# Altium PCB BatteryBoard.PcbDoc
Units mil, origin at the board's own origin, x right, y up, seen from the top; angles counter-clockwise.
Board outline 3543.88 x 3543.5 mil, 4 copper layers (Top Layer, GND, VCC, Bottom Layer), stack 68.756 mil thick; 53 components, 28 nets, 207 pads, 127 vias.
Unrouted connection lines stored in the file: 98.
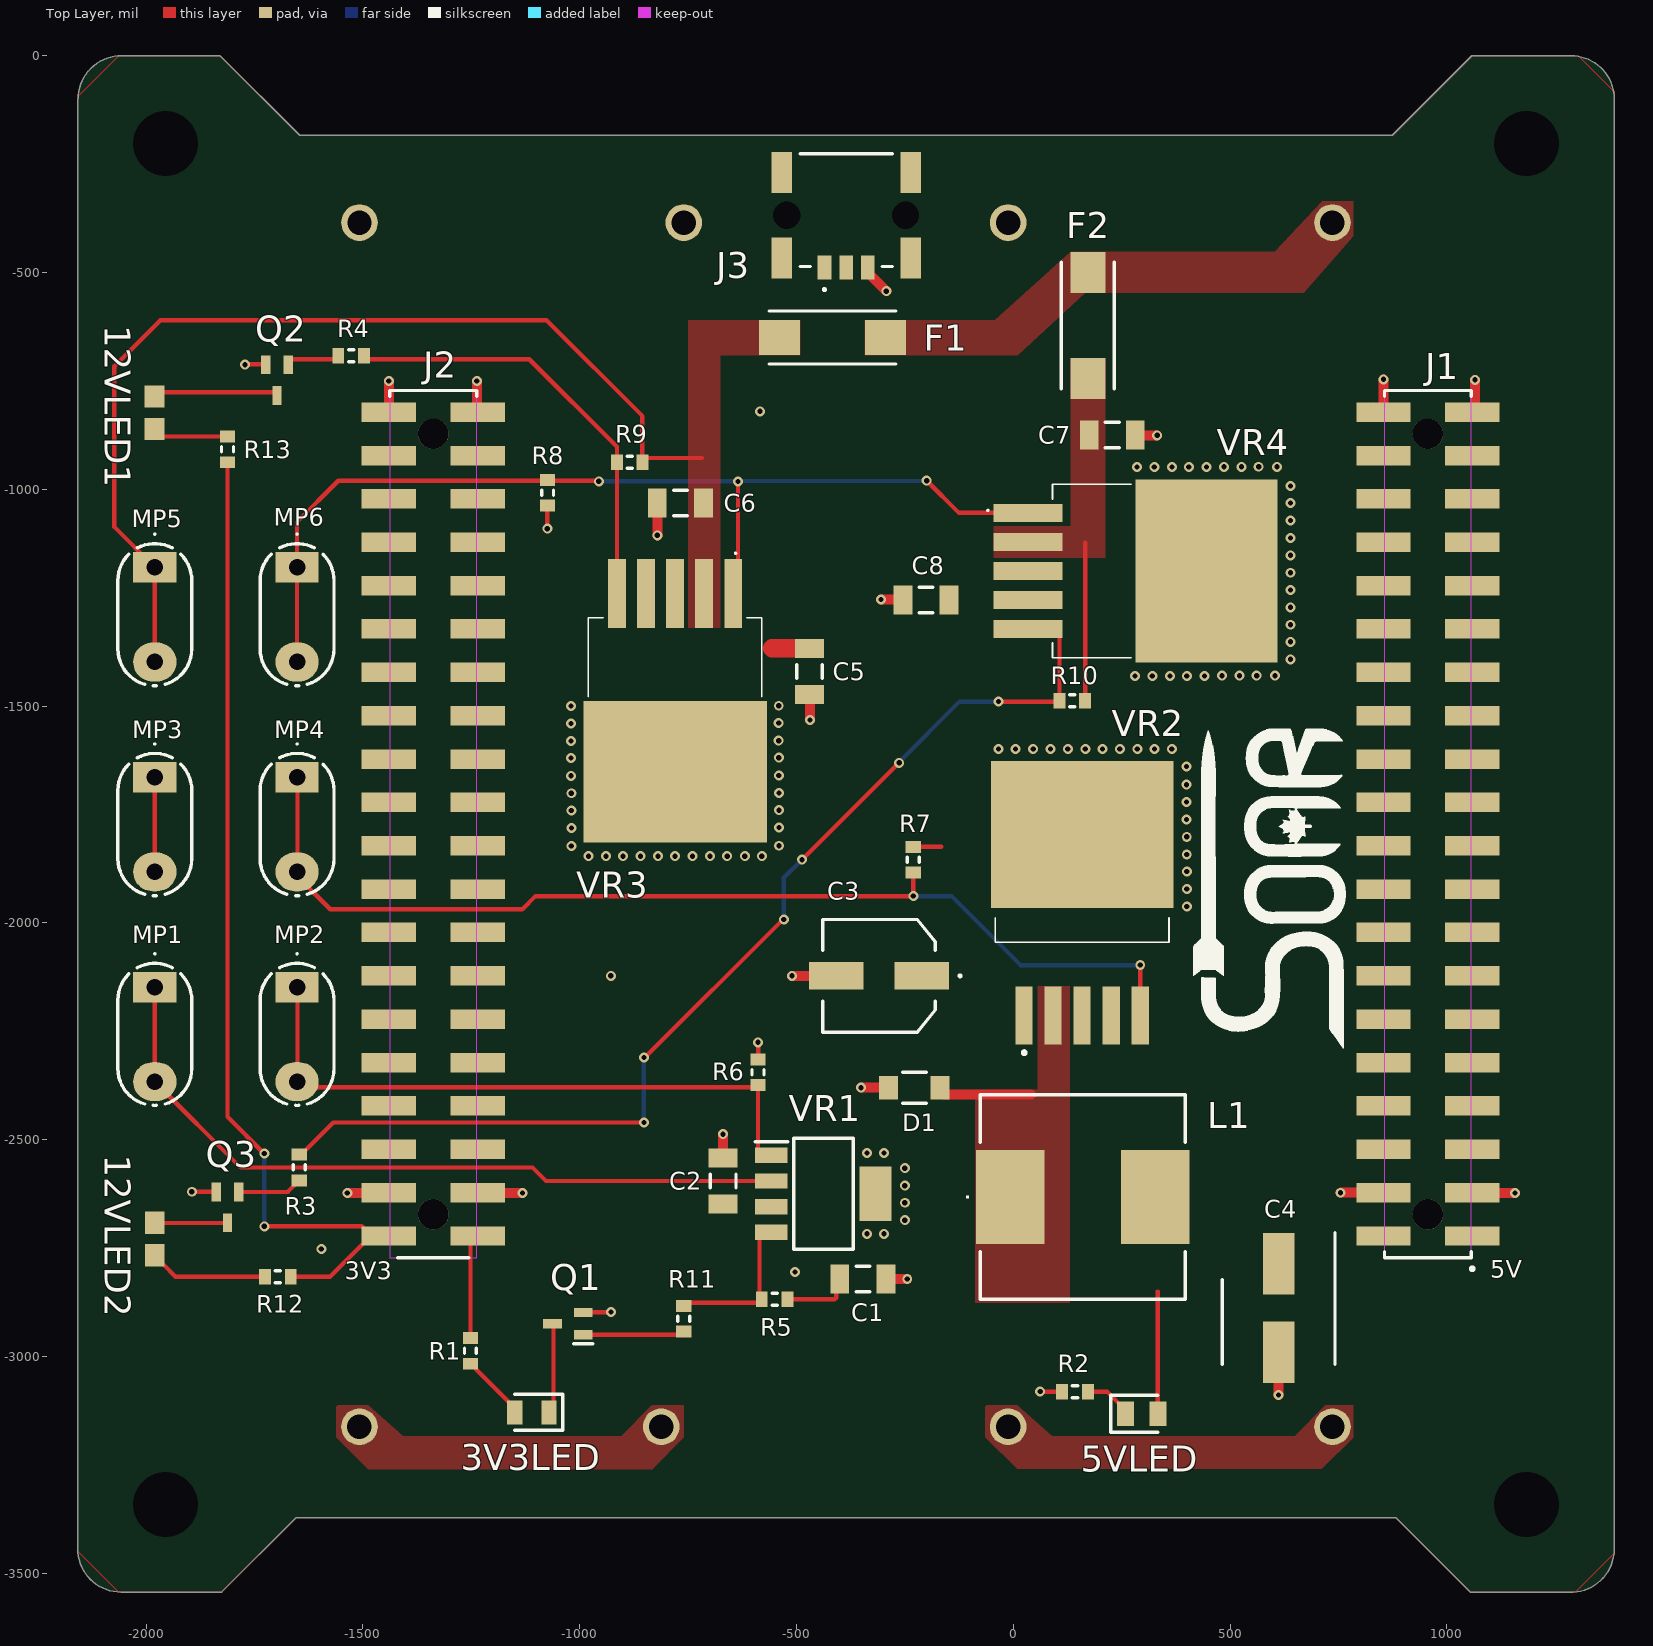
[diagram p0: Top Layer view]
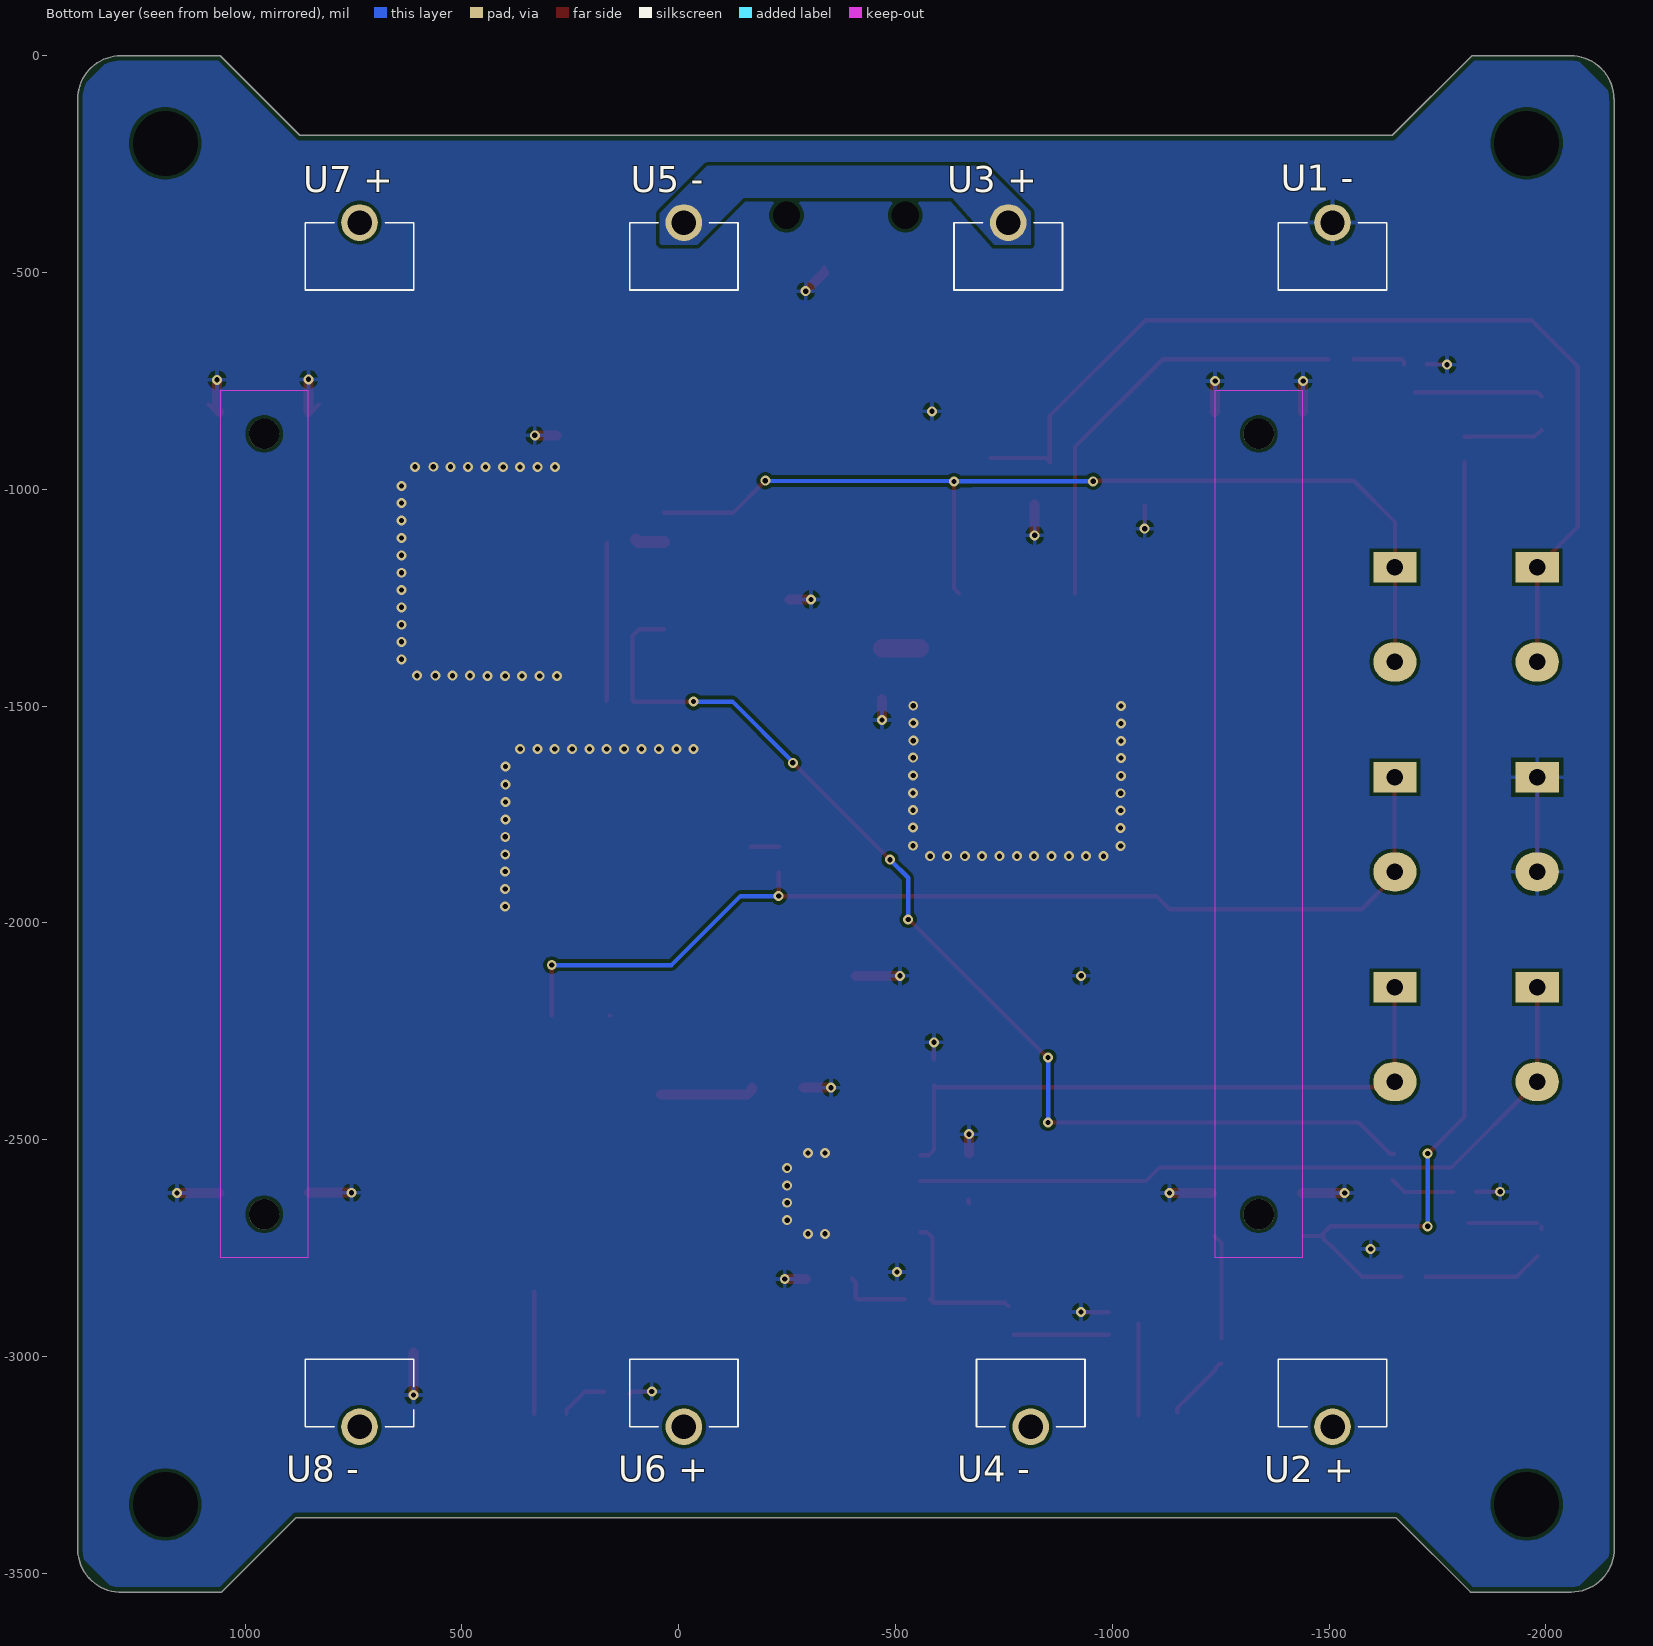
[diagram p1: Bottom Layer view, seen from below]
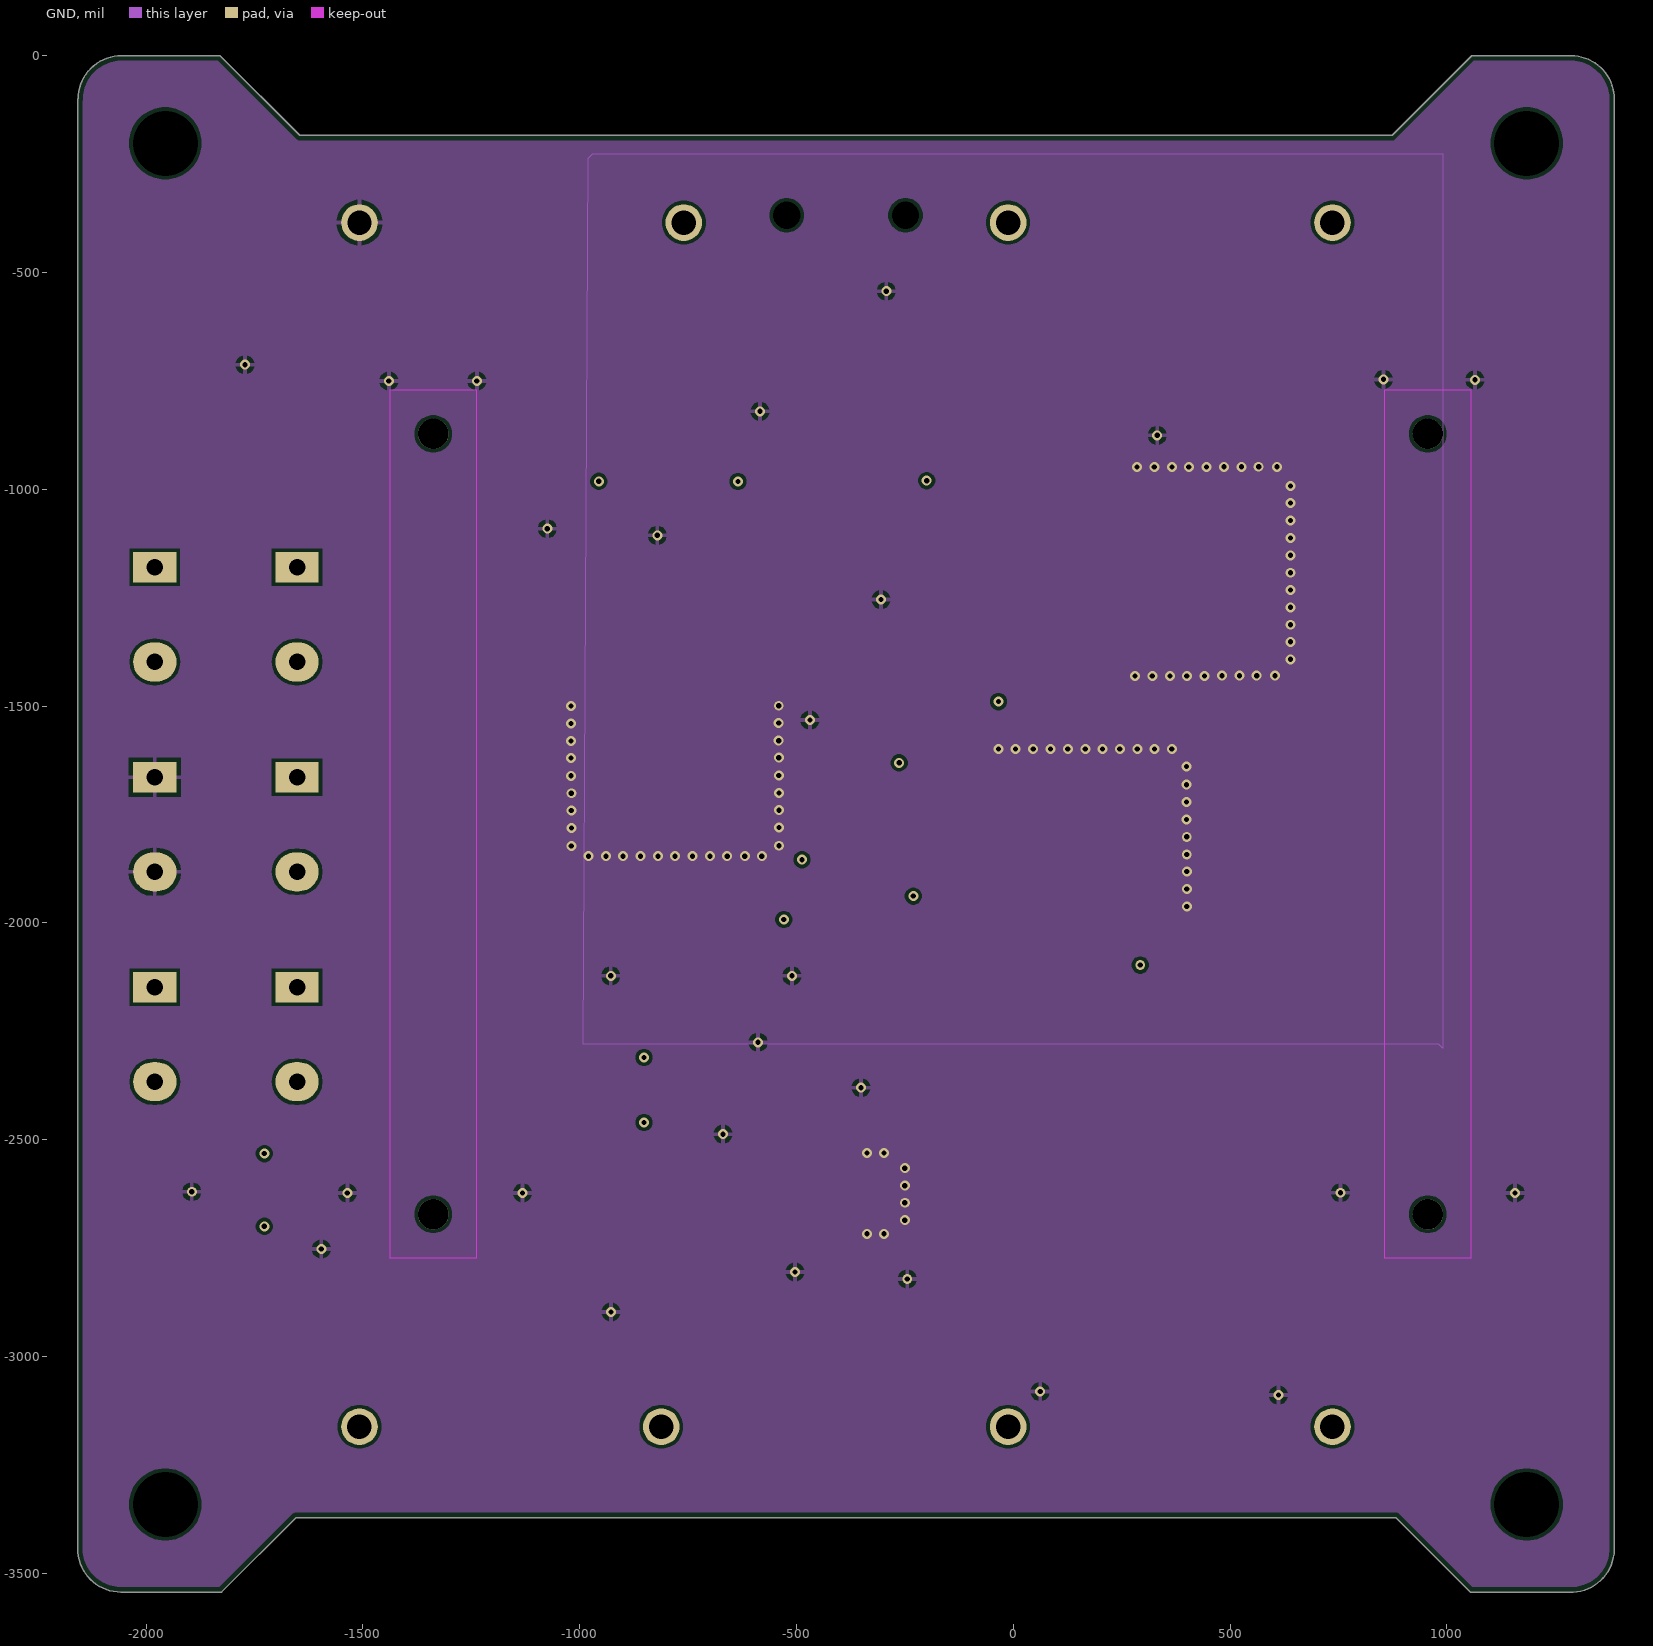
[diagram p2: GND]
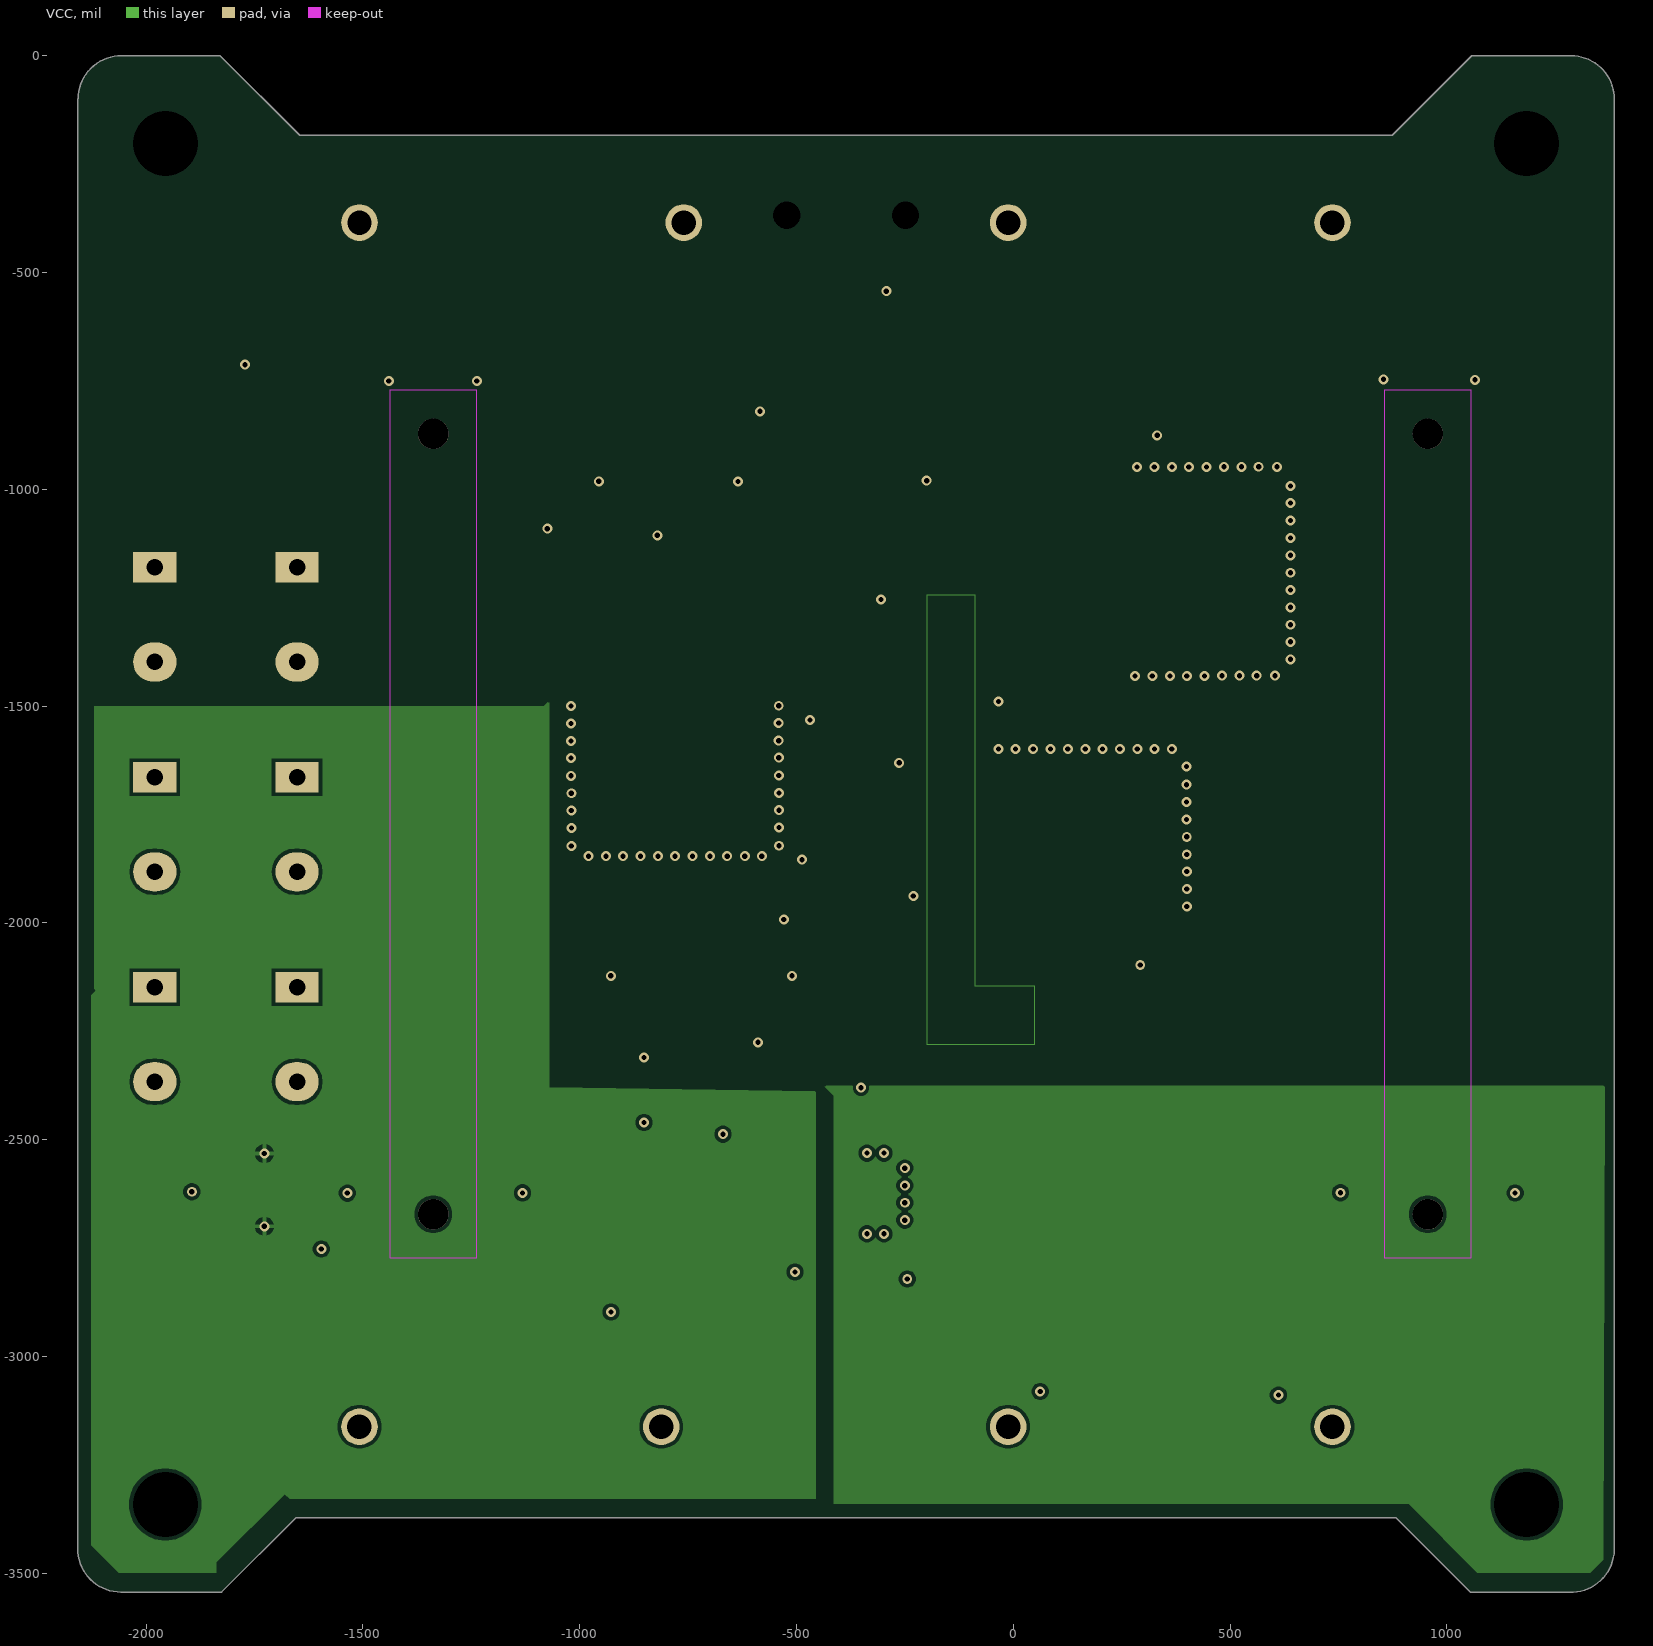
[diagram p3: VCC]

## Layer stack, top to bottom
Top Solder: solder mask 0.5, Solder Resist, Dk 3.3
Top Layer: signal copper 0.7
Dielectric 1: prepreg 2.8, PP-006, Dk 4.1
GND: signal copper 1.378
Dielectric1: core 59, FR-4, Dk 4.3
VCC: signal copper 1.378
Dielectric 2: prepreg 2.8, PP-006, Dk 4.1
Bottom Layer: signal copper 0.7
Bottom Solder: solder mask 0.5, Solder Resist, Dk 3.3

## Board outline
1386.02,-3438.34 cw(c1286.15,-3443.51) 1291.33,-3543.37 1054.01,-3543.37 882.01,-3371.37 -1653.99,-3371.37 -1825.99,-3543.37 -2058.37,-3543.37 -2058.37,-3543.32 cw(c-2057.85,-3443.33) -2157.85,-3442.8 -2157.85,-99.35 -2156.97,-99.35 cw(c-2056.97,-99.88) -2056.45,0.12 -2056.45,0 -1830.17,0 -1828.23,-1.13 -1645.99,-183.37 874.01,-183.37 1057.38,0 1286.18,0 1286.3,0.12 cw(c1286.03,-99.88) 1386.03,-100.14 1386.03,-2826.36

## Design rules (kind name [scope] priority, off if disabled: settings)
BoardOutlineClearance [All] p1: gap=11.81 ignorepadtopadclearanceinfootprint=FALSE except(15.75: Arc-SplitBarrior Arc-SplitContinuation Track-SplitBarrior Track-SplitContinuation SMDPad-SplitBarrior SMDPad-SplitContinuation THPad-SplitBarrior THPad-SplitContinuation Via-SplitBarrior Via-SplitContinuation Fill-SplitBarrior Fill-SplitContinuation Poly-SplitBarrior Poly-SplitContinuation Region-SplitBarrior Region-SplitContinuation Text-SplitBarrior Text-SplitContinuation)
Clearance "Clearance Different Nets" [All] p1: gap=7.87 ignorepadtopadclearanceinfootprint=FALSE except(3.5: Arc-Arc Arc-Track Arc-SMDPad Track-Track Track-SMDPad; 5: SMDPad-SMDPad SMDPad-Via THPad-Via Via-Via; 10: Arc-Via Arc-Text Track-Via Track-Text SMDPad-Text THPad-Text Via-Text Fill-Text Poly-Text Region-Text Text-Text; 19.68: THPad-THPad Via-Hole)
Clearance "Clearance Same Nets" [All] p2: gap=7.87 ignorepadtopadclearanceinfootprint=FALSE except(3.5: Arc-Arc Arc-Track Arc-SMDPad Track-Track Track-SMDPad SMDPad-SMDPad; 5: SMDPad-Via THPad-Via; 10: Arc-Via Arc-Text Track-Via Track-Text SMDPad-Text THPad-Text Via-Via Via-Text Fill-Text Poly-Text Region-Text Text-Text)
Clearance "Clearance Bottom Layer" [OnLayer('Bottom Layer')] p3: gap=8 ignorepadtopadclearanceinfootprint=TRUE except(10: Arc-Text Track-Text SMDPad-Text THPad-Text Via-Text Fill-Text Poly-Text Region-Text Text-Text)
Clearance "Clearance Top Layer" [OnLayer('Top Layer')] p4: gap=8 ignorepadtopadclearanceinfootprint=TRUE except(10: Arc-Text Track-Text SMDPad-Text THPad-Text Via-Text Fill-Text Poly-Text Region-Text Text-Text)
HoleSize [All] p1: absolutevalues=TRUE maxlimit=248.03 minlimit=7.87 maxpercent=80.000 minpercent=20.000
MinimumAnnularRing [All] p1: minimumring=5.12
MinimumSolderMaskSliver [All] p1: minsoldermaskwidth=3.94
PlaneClearance [All] p1: clearance=15
PolygonConnect PolygonConnect_1 [(InComponent('VR1') OR InComponent('VR2') OR InComponent('VR3') OR InComponent('VR4'))] p1: thpad.connectstyle=Relief thpad.reliefconductorwidth=10 thpad.reliefentries=4 thpad.polygonreliefangle="90 Angle" thpad.airgapwidth=10 smdpad.connectstyle=Direct smdpad.reliefconductorwidth=10 smdpad.reliefentries=4 smdpad.polygonreliefangle="90 Angle" smdpad.airgapwidth=10 via.connectstyle=Relief via.reliefconductorwidth=10 via.reliefentries=4 via.polygonreliefangle="90 Angle" via.airgapwidth=10
PolygonConnect "All Polygons" [(InNet('VBAT') OR InNet('3V3') OR InNet('5V') OR InNet('12V1') OR InNet('12V2') OR InNet('NetC6_1') OR InNet('NetC7_1') OR InNet('NetD1_1') OR InNet('NetD1_1') OR InNet('NetU3_1') OR InNet('NetU2_1') OR InNet('NetU6_1'))] p2: thpad.connectstyle=Direct thpad.reliefconductorwidth=10 thpad.reliefentries=4 thpad.polygonreliefangle="90 Angle" thpad.airgapwidth=10 smdpad.connectstyle=Direct smdpad.reliefconductorwidth=10 smdpad.reliefentries=4 smdpad.polygonreliefangle="90 Angle" smdpad.airgapwidth=10 via.connectstyle=Relief via.reliefconductorwidth=10 via.reliefentries=4 via.polygonreliefangle="90 Angle" via.airgapwidth=10 // Direct Connect
PolygonConnect [All] p3: connectstyle=Relief reliefconductorwidth=10 reliefentries=4 polygonreliefangle="90 Angle" airgapwidth=10
RoutingCorners [All] p1: cornerstyle=Round minsetback=100 maxsetback=100
RoutingVias [All] p1: holewidth=19.68 width=39.37 viastyle="Through Hole" minholewidth=7.87 minwidth=13.78 maxholewidth=39.37 maxwidth=78.74
SilkToSilkClearance [All] p1: silktosilkclearance=3.94
SilkToSolderMaskClearance [IsPad] p1: minsilkscreentomaskgap=3.94 clearancetoexposedcopper=TRUE
SolderMaskExpansion [All] p1: expansion=4 istentingtop=FALSE
Width [All] p1: maxlimit=100 minlimit=3.5 preferedwidth=15
24 further rules are at their usual default settings.

## Components (designator, comment, footprint, x,y, rotation, side; value= is the part's Value field where it differs from the comment)
3V3LED "APTD2012LZGCK" LEDC2012X105N -1110.17,-3128.72 r180 top
5VLED "APTD2012LQBC_D" LEDC2012X120N 296,-3132 r0 top
12VLED1 "APTD2012LSURCK" LEDM2012X120N -1980.73,-823.42 r270 top
12VLED2 "APTD2012LSURCK" LEDM2012X120N -1980,-2728.88 r270 top
C1 "Cap Semi" C1206 -347.07,-2821.01 r180 top value=10uF
C2 "Cap Semi" C1206 -669.21,-2595.18 r270 top value=10uF
C3 "100uF" EEEHP1H4R7P -309.91,-2121.97 r90 top
C4 "330uF" CAPAE660X800N 612,-2888 r270 top
C5 "Cap Semi" C1206 -469.98,-1420 r90 top value=10uF
C6 "Cap Semi" C1206 -768.03,-1031.19 r180 top value=0.1uF
C7 "Cap Semi" C1206 228.21,-874.94 r0 top value=0.1uF
C8 "Cap Semi" C1206 -201.44,-1255.37 r0 top value=10uF
D1 "SBR3U40S1F-7" SODFL3518X115N -228.45,-2380 r180 top
F1 "3404.0014.11" FUSM7431X260N -417.16,-649.77 r180 top
F2 "3404.0014.11" FUSM7431X260N 171.68,-622.06 r270 top
J1 "HW-20-16-F-D-250-SM-A" SAMTEC_HW-20-16-F-D-250-SM-A 1058.47,-2722 r90 top
J2 "HW-20-16-F-D-250-SM-A" SAMTEC_HW-20-16-F-D-250-SM-A -1235.37,-2722 r90 top
J3 "234450" 234450 -385.58,-368 r180 top
L1 "MSS1278H-334KED" MSS1278H334KED 160.06,-2632.03 r90 top
MP1 "7466310" 7466310 -1980,-2148 r270 top
MP2 "7466310" 7466310 -1652,-2148 r270 top
MP3 "7466310" 7466310 -1980,-1664 r270 top
MP4 "7466310" 7466310 -1652,-1664 r270 top
MP5 "7466310" 7466310 -1980,-1180 r270 top
MP6 "7466310" 7466310 -1652,-1180 r270 top
Q1 "2SC4213BTE85LF" SOT65P210X110-3N -1027.43,-2924.05 r180 top
Q2 "2SC4213BTE85LF" SOT65P210X110-3N -1698.32,-748 r270 top
Q3 "2SC4213BTE85LF" SOT65P210X110-3N -1812.4,-2656.04 r270 top
R1 "Res3" J1-0603 -1252,-2987.13 r90 top value=47
R2 "Res3" J1-0603 142.25,-3080.91 r180 top value=220
R3 "Res3" J1-0603 -1646.7,-2564 r270 top value=10k
R4 "Res3" J1-0603 -1527.39,-691.64 r180 top value=10k
R5 "Res3" J1-0603 -550.7,-2868.25 r0 top value=10K
R6 "Res3" J1-0603 -588.91,-2344.57 r270 top value=10K
R7 "Res3" J1-0603 -230.73,-1854.16 r270 top value=10K
R8 "Res3" J1-0603 -1074.22,-1008 r270 top value=10K
R9 "Res3" J1-0603 -885.03,-937.52 r0 top value=10K
R10 "Res3" J1-0603 136.03,-1487.84 r0 top value=10K
R11 "Res3" J1-0603 -759.85,-2913.01 r270 top value=10k
R12 "Res3" J1-0603 -1696,-2816 r0 top value=100
R13 "Res3" J1-0603 -1812.4,-908 r270 top value=100
"U1 -" "1017-1" 10171 -1508.06,-384.8 r0 bottom (schematic designator U1)
"U2 +" "1017-1" 10171 -1508.07,-3161.95 r180 bottom (schematic designator U2)
"U3 +" "1017-1" 10171 -760.03,-384.8 r0 bottom (schematic designator U3)
"U4 -" "1017-1" 10171 -812.04,-3161.95 r180 bottom (schematic designator U4)
"U5 -" "1017-1" 10171 -12,-384.8 r0 bottom (schematic designator U5)
"U6 +" "1017-1" 10171 -12,-3161.95 r180 bottom (schematic designator U6)
"U7 +" "1017-1" 10171 736.03,-384.8 r0 bottom (schematic designator U7)
"U8 -" "1017-1" 10171 736.03,-3161.95 r180 bottom (schematic designator U8)
VR1 "LP3852EMP-3.3_NOPB" SOT150P700X180-5N -437.99,-2624.71 r0 top
VR2 "TL2575-05IKTTR" TL1963AQKTTRQ1 158.87,-1997.97 r0 top
VR3 "MIC29301-12WU" MIC2930133WUTR -780.17,-1651.29 r180 top
VR4 "MIC29301-12WU" MIC2930133WUTR 445.36,-1188.36 r270 top

## Footprints (in the part's own frame and the unit in brackets; to place one, negate y for a bottom-side part, rotate by r counter-clockwise, add the part's x,y. Pads: shape width x height; smd on the part's side, far side on the other; paste and mask are expansions set on the pad)
10171 [mm]
  round 2.145 hole 1.43: 1(0,0)
  silkscreen extent -3.17,0 3.17,3.95, body extent -3.17,-0.61 3.17,3.95, height 13.94
234450 [mm]
  rect 0.8x1.4 smd: 1(1.27,3.05) 2(0,3.05) 3(-1.27,3.05)
  round 0.8 hole 1.6 unplated: MH1(-3.48,0) MH2(3.48,0)
  rect 1.2x2.4 smd: MP1(-3.78,2.5) MP2(-3.78,-2.5) MP3(3.78,-2.5) MP4(3.78,2.5)
  silkscreen extent -2.7,-3.6 2.7,4.4, body extent -4.45,-3.57 4.45,3.63, height 2.97
7466310 [mm]
  rect 1.778x2.54 hole 0.97: 1(0,0)
  oval 2.286x2.54 hole 0.97: 2(5.54,0)
  silkscreen extent -2,-2.16 6.94,2.16, body extent -1.38,-2.16 6.92,2.16, height 7.1
C1206 [mm] "Chip Capacitor, Body 3.2x1.6mm, IPC High Density"
  rect 1.1x1.7 smd: 1(-1.35,0) 2(1.35,0)
  silkscreen extent -0.4,-0.75 0.4,0.75, body extent -1.7,-0.9 1.7,0.9, height 1.3
CAPAE660X800N [mm]
  rect 3.6x1.85 smd: 1(-2.6,0) 2(2.6,0)
  silkscreen extent -4.4,-3.3 3.3,3.3, body extent -3.7,-3.4 3.7,3.4, height 8
EEEHP1H4R7P [mm]
  rect 1.6x3.2 smd: 1(0,-2.5) 2(0,2.5)
  silkscreen extent -3.3,-4.8 3.3,3.3, body extent -3.3,-3.65 3.3,3.65, height 7.7
FUSM7431X260N [mm]
  rect 2.4x2.05 smd: 1(-3.1,0) 2(3.1,0)
  silkscreen extent -3.7,-1.55 3.7,1.55
J1-0603 [mm] "Chip Resistor, Body 1.6x0.8mm, IPC High Density"
  rect 0.7x0.9 smd: 1(-0.75,0) 2(0.75,0)
  silkscreen extent -0.15,-0.35 0.15,0.35, body extent -0.85,-0.48 0.85,0.48, height 0.9
LEDC2012X105N [mm]
  rect 0.9x1.4 smd: 1(-1,0) 2(1,0)
  silkscreen extent -1.8,-1.05 1,1.05, body extent -1.03,-0.63 0.97,0.63, height 1.05
LEDC2012X120N [mm]
  rect 1x1.45 smd: 1(-0.95,0) 2(0.95,0)
  silkscreen extent -1.8,-1.07 0.95,1.07, body extent -1,-0.64 1,0.62, height 0.99
LEDM2012X120N [mm]
  rect 1.3x1.15 smd: 1(-0.95,0) 2(0.95,0)
  body extent -1,-0.63 1,0.63, height 1.05
MIC2930133WUTR [mil]
  rect 40.98x158.98 smd: 1(-134.02,-411.5) 2(-67.01,-411.5) 3(0,-411.5) 4(67.01,-411.5) 5(134.02,-411.5)
  rect 422.99x327.01 smd: 6(0,0)
  silkscreen extent -200,-506 200,-173, body extent -200,-355 200,0, height 204
MSS1278H334KED [mm]
  rect 5.5x4 smd: 1(0,4.25) 2(0,-4.25)
  silkscreen extent -6,-6 6,6.8, body extent -6,-6 6,6, height 8.15
SAMTEC_HW-20-16-F-D-250-SM-A [mm]
  rect 1.14x3.175 smd: 01(0,0) 02(0,5.205) 03(2.54,0) 04(2.54,5.205) 05(5.08,0) 06(5.08,5.205) 07(7.62,0) 08(7.62,5.205) 09(10.16,0) 10(10.16,5.205) 11(12.7,0) 12(12.7,5.205) 13(15.24,0) 14(15.24,5.205) 15(17.78,0) 16(17.78,5.205) 17(20.32,0) 18(20.32,5.205) 19(22.86,0) 20(22.86,5.205) 21(25.4,0) 22(25.4,5.205) 23(27.94,0) 24(27.94,5.205) 25(30.48,0) 26(30.48,5.205) 27(33.02,0) 28(33.02,5.205) 29(35.56,0) 30(35.56,5.205) 31(38.1,0) 32(38.1,5.205) 33(40.64,0) 34(40.64,5.205) 35(43.18,0) 36(43.18,5.205) 37(45.72,0) 38(45.72,5.205) 39(48.26,0) 40(48.26,5.205)
  round 1.78 hole 1.78 unplated mask+0.076: ""(1.27,2.603) ""(46.99,2.603)
  silkscreen extent -2.02,-0.1 49.53,5.14
SODFL3518X115N [mm]
  rect 1.12x1.37 smd: 1(-1.5,0) 2(1.5,0)
  silkscreen extent -0.69,-0.9 0.69,0.9, body extent -1.75,-0.9 1.75,0.9, height 1.15
SOT65P210X110-3N [mm]
  rect 1.1x0.55 smd: 1(-0.9,0.65) 2(-0.9,-0.65) 3(0.9,0)
  silkscreen extent -1.45,1.17 -0.35,1.17
SOT150P700X180-5N [mm]
  rect 1.9x0.9 smd: 1(-3.05,2.25) 2(-3.05,0.75) 3(-3.05,-0.75) 4(-3.05,-2.25)
  rect 1.9x3.2 smd: 5(3.05,0)
  silkscreen extent -4,-3.25 1.75,3.25, body extent -3.48,-3.25 3.48,3.25, height 1.68
TL1963AQKTTRQ1 [mm]
  rect 1x3.4 smd: 1(-3.4,-5.47) 2(-1.7,-5.47) 3(0,-5.47) 4(1.7,-5.47) 5(3.4,-5.47)
  rect 10.7x8.6 smd: 6(0,5.13)
  silkscreen extent -5.09,-7.75 5.09,0.25, body extent -5.08,-6.79 5.08,8.48, height 4.59

## Part data
3V3LED: "LED", Manufacturer_Name=Kingbright, Mouser Part Number=604-APTD2012LZGCK, Arrow Part Number=APTD2012LZGCK, Arrow Price/Stock=https://www.arrow.com/en/products/aptd2012lzgck/kingbright?region=nac, Datasheet Link=http://www.kingbrightusa.com/images/catalog/SPEC/APTD2012LZGCK.pdf, Height=1.05mm, Manufacturer_Part_Number=APTD2012LZGCK, Mouser Price/Stock=https://www.mouser.co.uk/ProductDetail/Kingbright/APTD2012LZGCK?qs=AQlKX63v8RvUnlqpSGhMeA%3D%3D
5VLED: "LED", Arrow Part Number=APTD2012LQBC/D, Manufacturer_Name=Kingbright, Mouser Part Number=604-APTD2012LQBCD, Arrow Price/Stock=https://www.arrow.com/en/products/aptd2012lqbcd/kingbright?region=nac, Datasheet Link=https://componentsearchengine.com/Datasheets/1/APTD2012LQBC_D.pdf, Height=1.2mm, Manufacturer_Part_Number=APTD2012LQBC/D, Mouser Price/Stock=https://www.mouser.co.uk/ProductDetail/Kingbright/APTD2012LQBC-D?qs=AQlKX63v8RvDGqprk6aUCg%3D%3D
12VLED1 12VLED2: "LED", Manufacturer_Name=Kingbright, Mouser Part Number=604-APTD2012LSURCK, Arrow Part Number=APTD2012LSURCK, Arrow Price/Stock=https://www.arrow.com/en/products/aptd2012lsurck/kingbright?region=nac, Datasheet Link=http://www.kingbrightusa.com/images/catalog/SPEC/APTD2012LSURCK.pdf, Height=1.2mm, Manufacturer_Part_Number=APTD2012LSURCK, Mouser Price/Stock=https://www.mouser.co.uk/ProductDetail/Kingbright/APTD2012LSURCK?qs=AQlKX63v8RvkMadNvwbkxw%3D%3D
C1 C2 C5 C6 C7 C8: "Capacitor (Semiconductor SIM Model)", LatestRevisionDate=29-May-2009, LatestRevisionNote="IPC-7351 Footprint Added.", PackageDescription="Chip Capacitor", PackageReference=C1206, Published=8-Jun-2000, Publisher="Altium Limited"
C3: library part EEE-FPE101XAL, "Capacitor Polarised", Manufacturer_Name=Panasonic, Mouser Part Number=667-EEE-FPE101XAL, Arrow Part Number=EEE-FPE101XAL, Arrow Price/Stock=https://www.arrow.com/en/products/eee-fpe101xal/panasonic?region=nac, Datasheet Link=http://industrial.panasonic.com/cdbs/www-data/pdf/RDE0000/RDE0000C1272.pdf, Manufacturer_Part_Number=EEE-FPE101XAL, Mouser Price/Stock=https://www.mouser.co.uk/ProductDetail/Panasonic/EEE-FPE101xAL?qs=vmHwEFxEFR%2FU1ayQL%252BhZlg%3D%3D
C4: library part EMZR160ARA331MF80G, "Capacitor Polarised", Manufacturer_Name=Chemi-Con, Mouser Part Number=661-EMZR160ARA331MF8, Arrow Part Number=EMZR160ARA331MF80G, Arrow Price/Stock=https://www.arrow.com/en/products/emzr160ara331mf80g/united-chemi-con, Datasheet Link=https://datasheet.datasheetarchive.com/originals/distributors/DKDS-39/4980.pdf, Height=8mm, Manufacturer_Part_Number=EMZR160ARA331MF80G, Mouser Price/Stock=https://www.mouser.co.uk/ProductDetail/United-Chemi-Con/EMZR160ARA331MF80G?qs=y6ZabgHbY%252BxNFfWWRjsyvw%3D%3D
D1: "Diode", Manufacturer_Name="Diodes Incorporated", Mouser Part Number=621-SBR3U40S1F-7, Arrow Part Number=SBR3U40S1F-7, Arrow Price/Stock=https://www.arrow.com/en/products/sbr3u40s1f-7/diodes-incorporated, Datasheet Link=https://www.arrow.com/en/products/sbr3u40s1f-7/diodes-incorporated, Height=1.15mm, Manufacturer_Part_Number=SBR3U40S1F-7, Mouser Price/Stock=https://www.mouser.co.uk/ProductDetail/Diodes-Incorporated/SBR3U40S1F-7?qs=HXFqYaX1Q2yP2B8FJNWOhg%3D%3D
F1 F2: "Fuse", Manufacturer_Name=SCHURTER, Mouser Part Number=693-3404.0014.11, Arrow Part Number=3404.0014.11, Arrow Price/Stock=https://www.arrow.com/en/products/3404.0014.11/schurter?region=europe, Datasheet Link=https://www.schurter.sg/en/datasheet/typ_OMF_125.pdf, Height=2.6mm, Manufacturer_Part_Number=3404.0014.11, Mouser Price/Stock=https://www.mouser.co.uk/ProductDetail/Schurter/3404001411?qs=8QfiMw8FY5MW%252BuaV2dEayA%3D%3D
J1 J2: Package=None, Availability=Unavailable, MP=HW-20-16-F-D-250-SM-A, Price=None
J3: "Connector", Manufacturer_Name=ERNI, Mouser Part Number=305-234450, Arrow Part Number=234450, Arrow Price/Stock=https://www.arrow.com/en/products/234450/erni-electronics?region=europe, Datasheet Link=https://www.erni.com/fileadmin/import/products/assets/DC0000169.PDF, Height=2.98mm, Manufacturer_Part_Number=234450, Mouser Price/Stock=https://www.mouser.co.uk/ProductDetail/ERNI/234450?qs=DK05bRAVOD4CDOGVl35lNg%3D%3D
L1: "Inductor", Manufacturer_Name=COILCRAFT, Mouser Part Number=994-MSS1278H-334KED, Datasheet Link=https://4donline.ihs.com/images/VipMasterIC/IC/COLC/COLC-S-A0010155479/COLC-S-A0010155479-1.pdf?hkey=EF798316E3902B6ED9A73243A3159BB0, Height=8.05mm, Manufacturer_Part_Number=MSS1278H-334KED, Mouser Price/Stock=https://www.mouser.co.uk/ProductDetail/Coilcraft/MSS1278H-334KED?qs=KUoIvG%2F9IlYsPneJA3QIdw%3D%3D
MP1 MP2 MP3 MP4 MP5 MP6: "Terminals WP-SMRA SMD w/Pins 5.5mm", Manufacturer_Name="Wurth Elektronik", Mouser Part Number=710-7466310, Datasheet Link=https://www.we-online.com/catalog/datasheet/7466310.pdf, Geometry.Height=7mm, Manufacturer_Part_Number=7466310, Mouser Price/Stock=https://www.mouser.co.uk/ProductDetail/Wurth-Elektronik/7466310?qs=HXFqYaX1Q2wJWeDTYvGsCg%3D%3D
Q1 Q2 Q3: "Transistor BJT NPN", Manufacturer_Name=Toshiba, Mouser Part Number=757-2SC4213BTE85LF, Datasheet Link=http://toshiba.semicon-storage.com/info/docget.jsp?did=19305&prodName=2SC4213, Height=1.1mm, Manufacturer_Part_Number=2SC4213BTE85LF, Mouser Price/Stock=https://www.mouser.co.uk/ProductDetail/Toshiba/2SC4213BTE85LF?qs=3kEcuH7qFhdqHZKOo23uyA%3D%3D
R1 R2 R3 R4 R5 R6 R7 R8 R9 R10 R11 R12 R13: "Resistor", LatestRevisionDate=29-May-2009, LatestRevisionNote="IPC-7351 Footprint Added.", PackageDescription="Chip Resistor", PackageReference=J1-0603, Published=8-Jun-2000, Publisher="Altium Limited"
"U1 -" "U2 +" "U3 +" "U4 -" "U5 -" "U6 +" "U7 +" "U8 -": "Undefined or Miscellaneous", Manufacturer_Name="Keystone Electronics", Mouser Part Number=534-1017-1, Datasheet Link=https://componentsearchengine.com/Datasheets/1/1017-1.pdf, Height=13.84mm, Manufacturer_Part_Number=1017-1, Mouser Price/Stock=https://www.mouser.co.uk/ProductDetail/Keystone-Electronics/1017-1?qs=wOxb8XianXhq6%252BfB2t0c2Q%3D%3D
VR1: "Integrated Circuit", Arrow Part Number=LP3852EMP-3.3/NOPB, Manufacturer_Name="Texas Instruments", Mouser Part Number=926-LP3852EMP33NOPB, Arrow Price/Stock=https://www.arrow.com/en/products/lp3852emp-3.3nopb/texas-instruments, Datasheet Link=http://www.ti.com/lit/ds/symlink/lp3852.pdf, Height=1.8mm, Manufacturer_Part_Number=LP3852EMP-3.3/NOPB, Mouser Price/Stock=https://www.mouser.co.uk/ProductDetail/Texas-Instruments/LP3852EMP-33-NOPB?qs=1FNqv8aZn1SurWe7DNzDPA%3D%3D
VR2: "Integrated Circuit", Manufacturer_Name="Texas Instruments", Mouser Part Number=595-TL2575-05IKTTR, Arrow Part Number=TL2575-05IKTTR, Arrow Price/Stock=https://www.arrow.com/en/products/tl2575-05ikttr/texas-instruments?region=nac, Datasheet Link=http://www.ti.com/lit/gpn/tl2575-05, Height=4mm, Manufacturer_Part_Number=TL2575-05IKTTR, Mouser Price/Stock=https://www.mouser.co.uk/ProductDetail/Texas-Instruments/TL2575-05IKTTR?qs=EnLMdcWnKADvl92kjFJdog%3D%3D
VR3 VR4: library part MIC29301-3.3WU-TR, "Integrated Circuit", Manufacturer_Name=Microchip, Mouser Part Number=998-MIC29301-3.3WUTR, Arrow Part Number=MIC29301-3.3WU-TR, Arrow Price/Stock=https://www.arrow.com/en/products/mic29301-3.3wu-tr/microchip-technology, Datasheet Link=http://www.microchip.com/mymicrochip/filehandler.aspx?ddocname=en580805, Height=5.08mm, Manufacturer_Part_Number=MIC29301-3.3WU-TR, Mouser Price/Stock=https://www.mouser.co.uk/ProductDetail/Microchip-Technology/MIC29301-3.3WU-TR?qs=U6T8BxXiZAWJme4uExHM0Q%3D%3D

## Free pads (board coordinates)
  round 60 hole 150 unplated mask+10: 9(1184.02,-202) 10(-1955.85,-202) 11(-1955.85,-3341.26) 12(1184.02,-3341.26)

## Via types
v1: diameter 23, hole 12, Top Layer to Bottom Layer, 127 vias

## Nets (pads, with @x,y where several pads share a name; then routed paths per layer and width w, separated by ;. In a path a pad name is that pad's centre, name@x,y a point inside that pad or via, vN(x,y) a via of type N, cw(c..) or ccw(c..) an arc to the next point about the centre after c; other vN are vias at no path point)
3V3: C2.2 J2.01 J2.02 R1.2 R12.2 R13.2 VR1.3 | length 2564.5
  Top Layer w10: R13.2 -1812.4,-2447.12 v1(-1727.41,-2532.11) ; v1(-1727.41,-2699.65) -1502.69,-2699.65 -1480.35,-2722 J2.02 ; R12.2@-1667.64,-2816 -1576,-2816 -1499.44,-2739.44 -1497.79,-2739.44 -1488,-2729.65 J2.02@-1488,-2724.05 ; R1.2 -1252,-2737.94 J2.01@-1236.06,-2722 ; C2.2@-669.33,-2646.27 C2.2@-669.33,-2638.66
  Bottom Layer w10: v1(-1727.41,-2699.65) v1(-1727.41,-2532.11)
5V: 5VLED.2 C1.2 C4.1 J1.01 J1.02 L1.2 MP1.1 MP1.2 R5.2 VR1.2 VR2.4 | length 2178.1
  Top Layer w10: MP1.1 MP1.2 -1782.11,-2564 -1109.13,-2564 -1077.94,-2595.18 VR1.2 ; R5.2 -412.29,-2868.25 -408.34,-2864.29 -408.34,-2829.13 C1.2 ; 5VLED.2 333.4,-2849.99
12V1: C5.2 J3.1 VR3.4 | length 95.5
  Top Layer w15: -561.96,-1361.59 -561.96,-1362.51 -555.62,-1368.85
  Top Layer w43: -555.62,-1366.85 C5.2
12V2: C3.1 C8.2 J3.2 R7.1 VR2.1 VR4.4 | length 65.5
  Top Layer w10: R7.1@-229.97,-1823.87 R7.1 -166.35,-1824.63
EN1: MP6.1 MP6.2 R8.1 VR3.1 VR4.1 | length 2343.1
  Top Layer w10: MP6.2 MP6.1 -1652,-1075.36 -1556.87,-980.23 -1061.78,-980.23 -1061.5,-979.96 -957.48,-979.96 v1(-956,-981.44) ; VR3.1 -635.03,-1228.67 v1(-635.03,-981.68) ; v1(-199.77,-979.96) -125.38,-1054.35 VR4.1
  Bottom Layer w10: v1(-956,-981.44) -676.09,-981.44 -675.85,-981.68 v1(-635.03,-981.68) -634.17,-980.82 -200.63,-980.82 v1(-199.77,-979.96)
ERROR: R5.1 R11.1 VR1.4 | length 360.6
  Top Layer w10: R11.1 -752.68,-2876.32 -588.3,-2876.32 R5.1 ; R5.1@-585.22,-2868.25 -585.22,-2726.01 -572.5,-2713.29 VR1.4
FLG1: R4.1 R9.1 VR3.5 | length 1005.3
  Top Layer w10: R4.1@-1497.87,-699.77 -1116.23,-699.77 -914.19,-901.81 VR3.5
FLG2: R3.1 R10.1 VR4.5 | length 2562.5
  Top Layer w10: R3.1@-1649.07,-2532.11 -1640.4,-2532.11 -1568.69,-2460.4 v1(-852,-2460.4) ; v1(-852,-2310.54) -849.89,-2310.54 -531.41,-1992.05 v1(-529.31,-1992.05) ; v1(-487.47,-1854.16) -487.09,-1854.16 -263.67,-1630.74 v1(-263.29,-1630.74) ; v1(-34.03,-1489.53) 104.81,-1489.53 R10.1 106.5,-1337.87 91.01,-1322.38 VR4.5
  Bottom Layer w10: v1(-852,-2460.4) v1(-852,-2310.54) ; v1(-529.31,-1992.05) -529.31,-1896 v1(-487.47,-1854.16) ; v1(-263.29,-1630.74) -263.29,-1628.52 -124.31,-1489.53 v1(-34.03,-1489.53)
GND: "U1 -.1" C1.1 C2.1 C3.2 C4.2 C5.1 C6.2 C7.2 C8.1 D1.2 J1.03 J1.04 J1.05 J1.06 J1.07 J1.08 J1.09 J1.10 J1.11 J1.12 J1.13 J1.14 J1.15 J1.16 J1.17 J1.18 J1.19 J1.20 J1.21 J1.22 J1.23 J1.24 J1.25 J1.26 J1.27 J1.28 J1.29 J1.30 J1.31 J1.32 J1.33 J1.34 J1.35 J1.36 J1.37 J1.38 J1.39 J1.40 J2.03 J2.04 J2.05 J2.06 J2.07 J2.08 J2.09 J2.10 J2.11 J2.12 J2.13 J2.14 J2.15 J2.16 J2.17 J2.18 J2.19 J2.20 J2.21 J2.22 J2.23 J2.24 J2.25 J2.26 J2.27 J2.28 J2.29 J2.30 J2.31 J2.32 J2.33 J2.34 J2.35 J2.36 J2.37 J2.38 J2.39 J2.40 J3.3 MP3.1 MP3.2 Q1.2 Q2.2 Q3.2 R2.2 R6.1 R8.2 VR1.5 VR2.3 VR2.6 VR3.3 VR3.6 VR4.3 VR4.6 | length 1933.3
  Top Layer w10: MP3.2 MP3.1 ; v1(-1894.76,-2620) Q3.2@-1837.99,-2620 ; v1@-1772,-711.65 Q2.2@-1725.11,-711.65 ; v1(-1074.85,-1090.77) -1074.85,-1038.16 R8.2 ; Q1.2 -991.5,-2897.95 -928.45,-2897.95 v1(-927.94,-2897.45) ; R6.1 -588.55,-2314.69 v1(-588.55,-2275.25) ; J3.3@-335.58,-499.89 J3.3 ; C8.1@-255.6,-1254.36 C8.1 ; v1(61.93,-3080.91) 107.78,-3080.91 R2.2@113.15,-3086.29 ; VR2.3 VR2.3@159.03,-2213.49 ; C7.2 C7.2@281.7,-875.29 ; J1.40@829.98,-804.56 847.42,-822 J1.40 ; J1.39@1066.56,-822 J1.39@1084,-804.56
  Top Layer w23: v1(-1536,-2623.21) -1535.57,-2622.78 J2.04@-1437.85,-2622.78 ; J2.40 v1(-1440.29,-750.1) ; v1(-1237.33,-750.19) -1237.33,-820.03 J2.39 ; J2.03@-1230.22,-2623.07 -1132.5,-2623.07 v1(-1132.07,-2622.64) ; v1(-821.18,-1106.01) C6.2@-821.18,-1035.29 ; v1(-669.4,-2487.21) -669.21,-2487.4 C2.1@-669.21,-2532.25 ; v1(-510.7,-2121.97) C3.2 ; v1(-469.24,-1532.23) C5.1@-469.24,-1483.29 ; v1(-351.38,-2380) D1.2 ; J3.3@-335.58,-499.89 -293,-542.47 v1(-293,-543) ; v1(-305.25,-1254.36) C8.1@-255.6,-1254.36 ; C1.1 v1(-244.62,-2821.01) ; C7.2@281.7,-875.29 331.77,-875.29 v1(331.84,-875.36) ; v1(611.35,-3089.09) 612,-3088.44 C4.2 ; v1(754.73,-2622.27) 755.16,-2621.85 J1.04@852.88,-2621.85 ; J1.40 853.55,-746.65 v1(853.92,-746.28) ; J1.39 1064.56,-815.92 v1(1064.56,-747.38) ; J1.03@1059.19,-2623.13 1156.91,-2623.13 v1(1157.34,-2622.7)
  other v1: -503.46,-2805.25 -1596,-2752 -337.6,-2717.04 -298.23,-2717.04 -250.32,-2685.64 -250.32,-2645.36 -250.32,-2605.96 -250.32,-2565.68 -337.6,-2530.94 -298.23,-2530.94 -928.45,-2121.97 400.07,-1962.07 400.14,-1921.97 400.14,-1881.45 -979.73,-1846 -939.45,-1846 -900.05,-1846 -859.77,-1846 -819.82,-1846 -780.13,-1846 -739.85,-1846 -699.88,-1846 -659.9,-1846 -619.32,-1846 -580.08,-1846 400,-1842.37 -1019.48,-1822.89 -540.46,-1822 400,-1801.45 -1019.34,-1780.89 -540.32,-1780 399.55,-1761.16 -1019.48,-1740.89 -540.46,-1740 399.55,-1721.18 -1019.48,-1700.92 -540.46,-1700.03 399.41,-1681.18 -1019.93,-1660.63 -540.92,-1659.74 399.55,-1639.18 -1019.93,-1619.7 -540.92,-1618.81 -34.03,-1599.01 5.2,-1599.01 45.78,-1599.01 85.76,-1599.01 125.73,-1599.01 166.01,-1599.01 205.7,-1599.01 245.66,-1599.01 285.93,-1599.01 325.34,-1599.01 365.61,-1599.01 -1020.07,-1580.62 -541.05,-1579.73 -1020.07,-1540.1 -541.05,-1539.21 -1020,-1500 -540.98,-1499.11 280.44,-1430.39 320.53,-1430.46 361.06,-1430.46 400.14,-1430.32 441.06,-1430.32 481.35,-1429.86 521.33,-1429.86 561.33,-1429.72 603.33,-1429.86 639,-1391.97 639,-1351.7 639,-1312.3 639,-1272.02 639,-1232.07 639,-1192.37 639,-1152.09 639,-1112.12 639,-1072.15 639,-1031.56 639,-992.33 285.11,-948.5 325.21,-948.57 365.73,-948.57 404.81,-948.43 445.74,-948.43 486.03,-947.97 526,-947.97 608,-947.97 566,-947.84 -584.05,-820.03 -1772,-712.57
Net3V3LED_1: 3V3LED.1 Q1.3 | length 211.3
  Top Layer w10: 3V3LED.1@-1060.63,-3135.28 Q1.3@-1060.63,-2924
Net3V3LED_2: 3V3LED.2 R1.1 | length 156.9
  Top Layer w10: R1.1 -1248.06,-3016.66 -1239.28,-3025.44 -1239.28,-3029.38 -1162.5,-3106.16 -1162.26,-3106.16 -1149.54,-3118.88 3V3LED.2
Net5VLED_1: 5VLED.1 R2.1 | length 113.2
  Top Layer w10: R2.1 216.37,-3080.91 258.6,-3123.14 5VLED.1
Net12VLED1_1: 12VLED1.1 Q2.3 | length 296.6
  Top Layer w10: 12VLED1.1@-1990.75,-786.01 -1980.73,-776 Q2.3@-1698.32,-776
Net12VLED1_2: 12VLED1.2 R13.1 | length 182.9
  Top Layer w10: 12VLED1.2@-1990.75,-863.77 -1973.11,-877.21 -1825.12,-878.37 R13.1
Net12VLED2_1: 12VLED2.1 Q3.3 | length 165.1
  Top Layer w10: 12VLED2.1@-1990.03,-2706.15 12VLED2.1@-1990.03,-2700.69 ; 12VLED2.1@-1980,-2692 Q3.3@-1820.38,-2692
Net12VLED2_2: 12VLED2.2 R12.1 | length 277.7
  Top Layer w10: 12VLED2.2@-1980,-2768.25 -1980,-2769.23 -1962.36,-2786.87 -1961.38,-2786.87 -1932.25,-2816 R12.1@-1722.63,-2816
NetC6_1: C6.1 F1.2 MP5.1 MP5.2 R9.2 VR3.2 | length 2322.5
  Top Layer w10: MP5.2 MP5.1 -2073.31,-1086.69 -2073.31,-715.9 -1967.16,-609.75 -1076.81,-609.75 -855.5,-831.06 R9.2 -855.5,-936.6 -846.72,-927.82 -718.3,-927.82
NetC7_1: C7.1 F2.2 R10.2 VR4.2 | length 431
  Top Layer w10: R10.2 165.55,-1123.36
  Top Layer w28: VR4.2 92.86,-1121.35 VR4.2@98.17,-1116.04
NetD1_1: D1.1 L1.1 VR2.2 | length 219.6
  Top Layer w23: D1.1 -169.4,-2384.92 -158.85,-2395.47 -151.43,-2395.47 -151.09,-2395.81 40.73,-2395.81
NetQ1_1: Q1.1 R11.2 | length 219.9
  Top Layer w10: Q1.1 R11.2@-772.11,-2949.64
NetQ2_1: Q2.1 R4.2 | length 125.2
  Top Layer w10: Q2.1 -1672.73,-705.6 -1666.91,-699.77 R4.2@-1556.92,-699.77
NetQ3_1: Q3.1 R3.2 | length 151.3
  Top Layer w10: Q3.1 -1673.74,-2620.57 R3.2
NetU2_1: "U2 +.1" "U4 -.1"
NetU3_1: "U3 +.1" "U5 -.1"
NetU6_1: "U6 +.1" "U8 -.1"
ON/OFF: MP4.1 MP4.2 R7.2 VR2.5 | length 2460.9
  Top Layer w10: MP4.1@-1650.87,-1656 -1650.87,-1882.11 -1650.87,-1893.13 -1575.53,-1968.47 -1132.3,-1968.47 -1102.01,-1938.18 v1(-230.73,-1938.18) R7.2 ; VR2.5 v1(292.72,-2097.26)
  Bottom Layer w10: v1(-230.73,-1938.18) -142.4,-1938.18 16.69,-2097.26 v1(292.72,-2097.26)
SD: MP2.1 MP2.2 R6.2 VR1.1 | length 1476.4
  Top Layer w10: MP2.1@-1650.87,-2148 MP2.2@-1650.87,-2366.11 ; VR1.1 -576.19,-2536.13 -588.91,-2523.41 R6.2 -594,-2379.19 -1625.55,-2379.19 -1638.63,-2366.11 MP2.2 ; MP2.2 MP2.2@-1650.87,-2366.11 ; MP2.2 MP2.2@-1650.87,-2366.11
VBAT: "U7 +.1" F1.1 F2.1 | length 0.1
  Top Layer w28: 736.03,-385.68 736.09,-385.68
pads on no net: J1. J2. J3.MH1 J3.MH2 J3.MP1 J3.MP2 J3.MP3 J3.MP4

## Polygon pours and split planes (outlines as drawn)
GND on Top Layer "GND_L01_P032" (solid, shelved, pour order 32): -2063.2,0.11 -2063.1,0 -1829.36,0 -1645.99,-183.37 874.82,-183.37 1058.37,0.17 1302.94,0.17 1385.92,-82.8 1385.92,-3453.59 1296.14,-3543.37 1054.01,-3543.37 882.01,-3371.37 -1653.99,-3371.37 -1653.99,-3371.38 -1825.99,-3543.37 -2063.31,-3543.37 -2158.51,-3448.17 -2158.04,-3447.7 -2158.04,-90.29 -2153.6,-90.29
NetC6_1 on Top Layer "NETC6_1_L01_P015" (solid, pour order 15): -491.88,-690.22 -491.88,-609.75 -749.9,-609.75 -749.9,-1318.99 -676.22,-1318.99 -676.22,-690.22
NetU6_1 on Top Layer "NETU6_1_L01_P031" (solid, pour order 31): 784.19,-3187.03 711.85,-3259.37 9.15,-3259.37 -64.39,-3185.83 -64.39,-3111.89 9.15,-3112.3 89.98,-3183.37 649.08,-3183.37 719.65,-3111.89 784.19,-3111.89
NetU2_1 on Top Layer "NETU2_1_L01_P028" (solid, pour order 28): -759.85,-3186.26 -832,-3258.41 -832,-3260 -1488,-3260 -1561.54,-3186.46 -1561.54,-3112.52 -1488,-3112.93 -1407.17,-3184 -904.15,-3184 -833.59,-3112.52 -759.85,-3112.52
VBAT on Top Layer "VBAT_L01_P026" (solid, pour order 26): 783.69,-415.99 669.42,-546.15 165.55,-546.15 9.97,-690.22 -342.49,-690.22 -342.49,-609.75 -42.76,-609.75 132,-451.76 603.33,-451.76 712.67,-336 783.69,-336
NetC7_1 on Top Layer "NETC7_1_L01_P016" (solid, pour order 16): 132,-1084.84 -45.43,-1084.84 -45.43,-1157.87 114.69,-1157.87 212.46,-1157.87 212.46,-697.77 132,-697.77
NetD1_1 on Top Layer "NETD1_1_L01_P017" (solid, pour order 17): 130.12,-2876.32 130.12,-2146.4 56,-2146.4 56,-2384.92 -88,-2384.92 -88,-2876.32
GND on Bottom Layer "GND_L04_P030" (solid, pour order 30): -2063.2,0.11 -2063.1,0 -1829.36,0 -1645.99,-183.37 874.82,-183.37 1058.37,0.17 1302.94,0.17 1385.92,-82.8 1385.92,-3453.59 1296.14,-3543.37 1054.01,-3543.37 882.01,-3371.37 -1653.99,-3371.37 -1653.99,-3371.38 -1825.99,-3543.37 -2063.31,-3543.37 -2158.51,-3448.17 -2158.04,-3447.7 -2158.04,-90.29 -2153.6,-90.29
NetU3_1 on Bottom Layer "NETU3_1_L04_P002" (solid, pour order 2): 43.41,-363.43 -66.03,-253.94 -706.29,-253.94 -812,-359.66 -812,-436 -728,-436 -631.5,-328 -150.52,-328 -42.52,-436 43.85,-436
no net on GND "NONET_L02_P034" (solid, pour order 34): -980,-236 -970.17,-226.17 990.33,-226.17 990.33,-2289.5 981.08,-2280.25 -992,-2280.25
GND on GND "GND_L02_P033" (solid, pour order 33): 1386.02,-3438.34 cw(c1286.15,-3443.51) 1291.33,-3543.37 1054.01,-3543.37 882.01,-3371.37 -1653.99,-3371.37 -1825.99,-3543.37 -2058.37,-3543.37 -2058.37,-3543.32 cw(c-2057.85,-3443.33) -2157.85,-3442.8 -2157.85,-99.35 -2156.97,-99.35 cw(c-2056.97,-99.88) -2056.45,0.12 -2056.45,0 -1830.17,0 -1828.23,-1.13 -1645.99,-183.37 874.01,-183.37 1057.38,0 1286.18,0 1286.3,0.12 cw(c1286.03,-99.88) 1386.03,-100.14 1386.03,-2826.36
5V on VCC "5 Volts" (solid, pour order 40): 1364,-2376 1363,-2375 -431.51,-2375 -434.55,-2378.03 -413.99,-2398.58 -413.99,-3340 911.82,-3340 1070.3,-3498.48 1331.06,-3498.48 1360.43,-3469.12
12V2 on VCC "12V2_L03_P025" (solid, pour order 25): -199.77,-1243.71 -199.77,-2280.04 49.22,-2280.04 49.22,-2146.4 -88,-2146.4 -88,-1243.71
3V3 on VCC "3.3 Volts" (solid, pour order 41): -458.27,-2388.31 -456,-2390.57 -456,-3328 -1669.12,-3328 -1680.03,-3317.09 -1837.99,-3475.06 -1837.99,-3499.04 -2063.16,-3499.04 -2126.46,-3435.74 -2126.46,-2166.46 -2116,-2156 -2120,-2152 -2120,-1500 -1082.92,-1500 -1070.8,-1487.88 -1070.8,-2379.19

## Keep-outs
Keep-Out Layer:
  region: 1056.03,-772 855.99,-772 855.99,-2772 1056.03,-2772
  region: -1237.81,-772 -1437.85,-772 -1437.85,-2772 -1237.81,-2772

## Silkscreen, mask and mechanical layers (free items; w line width, h text height)
Top Overlay:
  drawing of 5 lines, arcs and shapes, not listed
  text "5V" at 1100,-2818.36 h40
  text "3V3" at -1542.14,-2821.78 h40
Board:
  lines w10: -2157.85,-99.35 -2157.85,-3442.8 ccw(c-2057.85,-3443.33) -2058.37,-3543.32 ; -2156.97,-99.35 cw(c-2056.98,-99.88) -2056.45,0.12 ; -2058.37,-3543.37 -1825.99,-3543.37 -1653.99,-3371.37 882.01,-3371.37 1054.01,-3543.37 1291.33,-3543.37 ccw(c1286.15,-3443.51) 1386.02,-3438.34 1386.03,-2826.36 1386.03,-100.14 ccw(c1286.03,-99.88) 1286.3,0.12 ; -2056.45,0 -1830.17,0 ; -1828.23,-1.13 -1645.99,-183.37 874.01,-183.37 1057.38,0 1286.18,0